# Altium PCB 电源小板.PcbDoc
Units mil, origin at the board's own origin, x right, y up, seen from the top; angles counter-clockwise.
Board outline 6000 x 4000 mil, 2 copper layers (Top Layer, Bottom Layer); 30 components, 11 nets, 136 pads, 0 vias.
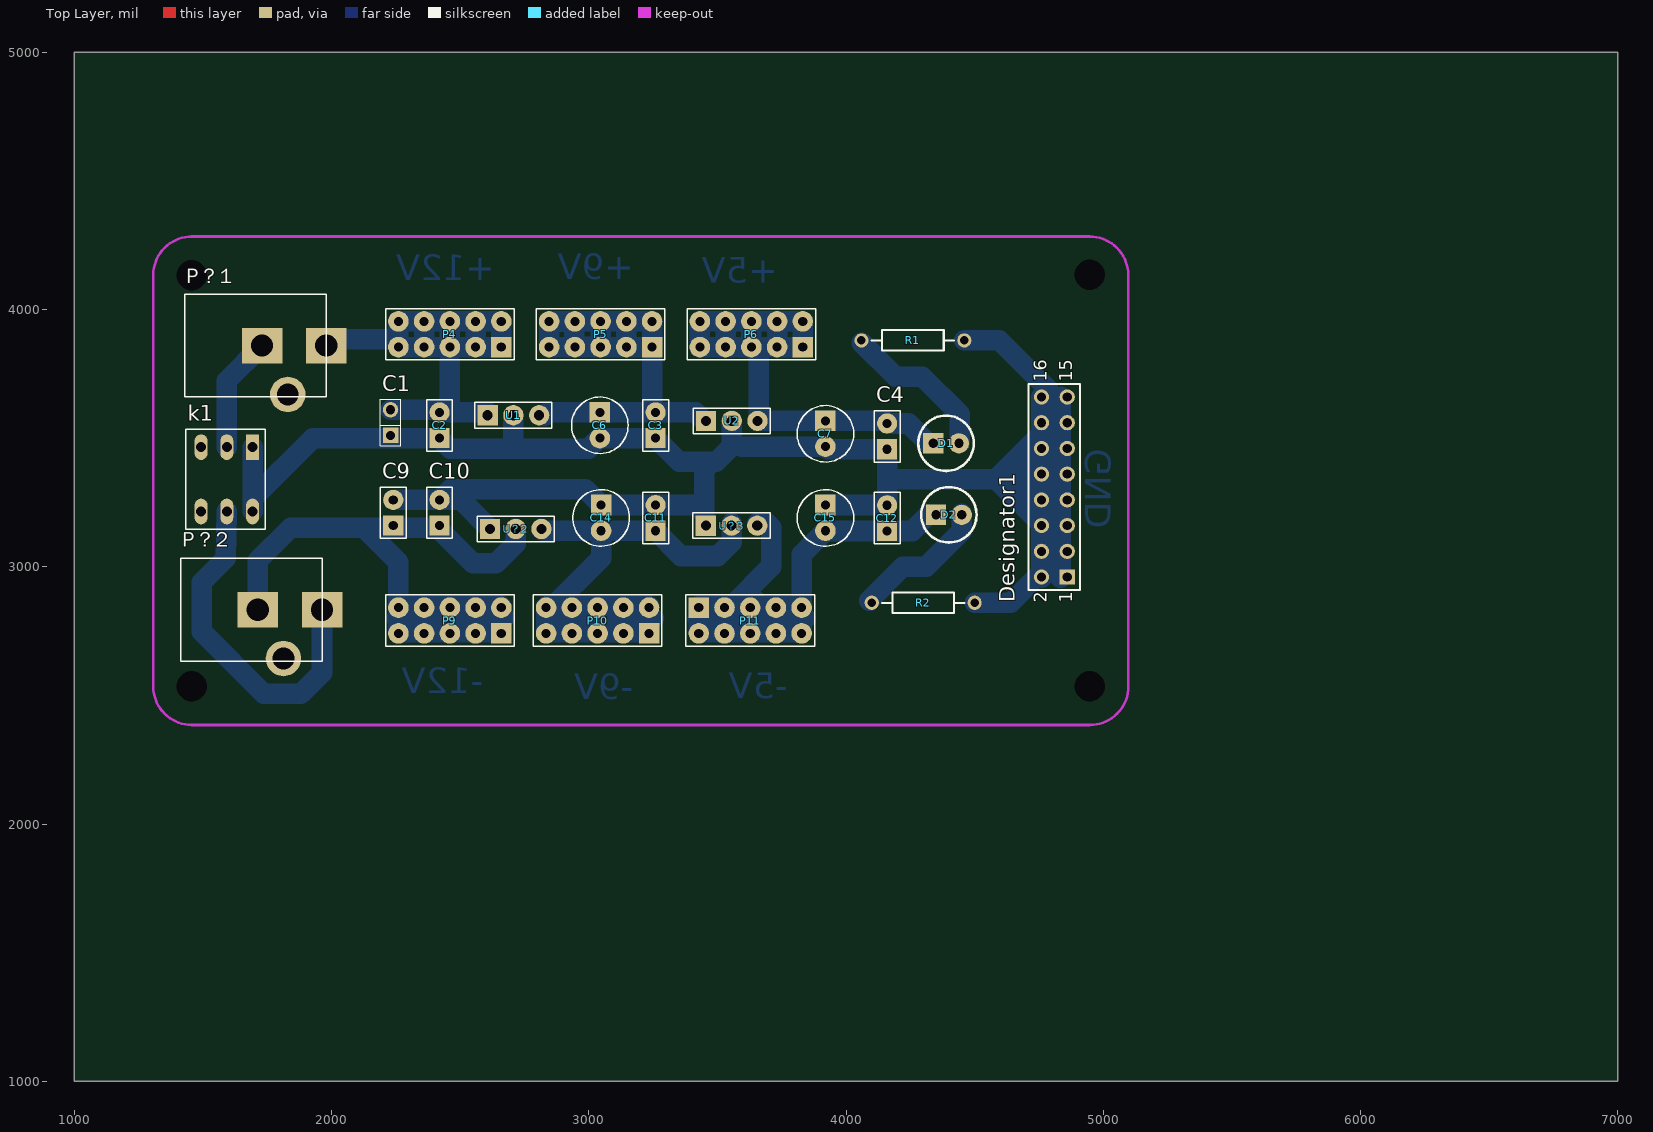
[diagram p0: Top Layer view]
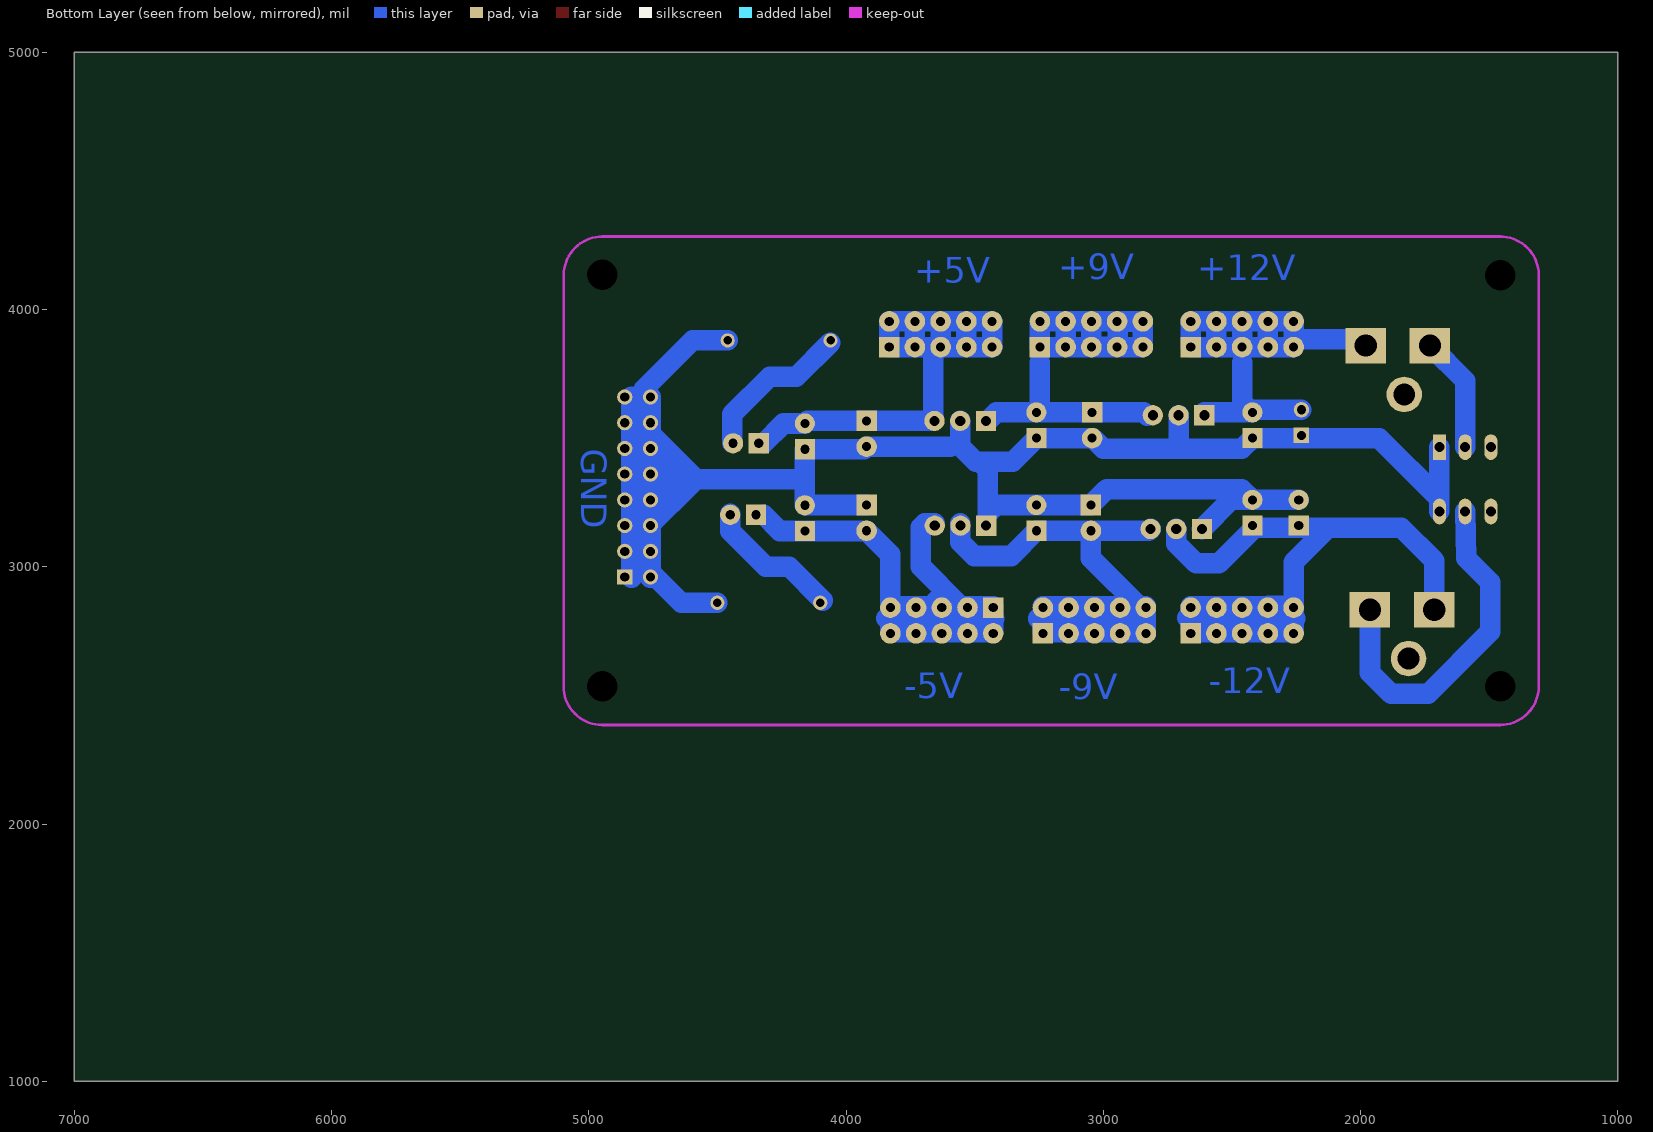
[diagram p1: Bottom Layer view, seen from below]

## Layer stack, top to bottom
Top Layer: signal copper 1.4
Dielectric: dielectric 12.6, FR-4, Dk 4.8
Bottom Layer: signal copper 1.4

## Board outline
1000,1000 7000,1000 7000,5000 1000,5000

## Design rules (kind name [scope] priority, off if disabled: settings)
Clearance [All] p1: gap=15
HoleToHoleClearance [All] p1: gap=0 allowstackedmicrovias=TRUE
MinimumSolderMaskSliver [All] p1: minsoldermaskwidth=0
PlaneClearance [All] p1: clearance=15
PolygonConnect [All] p1: connectstyle=Relief reliefconductorwidth=10 reliefentries=4 polygonreliefangle="90 Angle"
RoutingLayers [All] p1: top layer_v5=FALSE bottom layer_v5=TRUE
RoutingVias [All] p1: holewidth=28 width=50 viastyle="Through Hole" minholewidth=28 minwidth=50 maxholewidth=28 maxwidth=50
SilkToSilkClearance [All] p1: silktosilkclearance=0
SilkscreenOverComponentPads [All] p1: minsilkscreentomaskgap=0
SolderMaskExpansion [All] p1: expansion=4
TestPointUsage [All] p1: valid=0 allowmultiple=FALSE
Testpoint [All] p1: side=15 testpointundercomponent=TRUE minsize=40 maxsize=100 preferedsize=60 minholesize=0 maxholesize=40 preferedholesize=32 testpointgrid=1 style=1021 order=0-112345678
Width [All] p1: maxlimit=10000 minlimit=10 preferedwidth=20
18 further rules are at their usual default settings.

## Components (designator, comment, footprint, x,y, rotation, side; value= is the part's Value field where it differs from the comment)
C1 "瓷片电容" "PIN 2" 2229.5,3510.5 r90 top
C2 "100nf" C瓷片电容 2420,3500 r90 top
C3 "100nf" C瓷片电容 3260,3500 r90 top
C4 "100nf" C瓷片电容 4160,3457 r90 top
C6 "C电解电容" "C (10,100,330UF)" 3043,3600 r0 top
C7 "C电解电容" "C (10,100,330UF)" 3920,3567 r0 top
C9 "100nf" C瓷片电容 2240,3160 r90 top
C10 "100nf" C瓷片电容 2420,3160 r90 top
C11 "100nf" C瓷片电容 3260,3140 r90 top
C12 "100nf" C瓷片电容 4160,3139 r90 top
C14 "C电解电容" "C (10,100,330UF)" 3048,3240 r0 top
C15 "C电解电容" "C (10,100,330UF)" 3920,3240 r0 top
D1 "LED" LED 4339,3480 r0 top
D2 "LED" LED 4350,3202 r0 top
Designator1 "Comment" HDR2X8 4860,2960 r90 top
k1 "key6" key6 1693,3465 r270 top
P4 "PIN5*2" PIN5*2 2660,3854 r180 top
P5 "PIN5*2" PIN5*2 3246,3854 r180 top
P6 "PIN5*2" PIN5*2 3832,3854 r180 top
P9 "PIN5*2" PIN5*2 2660,2741 r180 top
P10 "PIN5*2" PIN5*2 3234.33,2741 r180 top
P11 "PIN5*2" PIN5*2 3427.67,2841 r0 top
P？1 "电源接口" 电源接口 1980,3860 r180 top
P？2 "电源接口" 电源接口 1963,2833 r180 top
R1 "Res2" AXIAL-0.4 4260,3880 r0 top
R2 "Res2" AXIAL-0.4 4300,2860 r180 top
U1 "7805" 7805 2778,3482 r0 top
U2 "7805" 7805 3627,3460 r0 top
U？2 "7905" 7805 2787,3040 r0 top
U？3 "7905" 7805 3626,3053 r0 top

## Footprints (in the part's own frame and the unit in brackets; to place one, negate y for a bottom-side part, rotate by r counter-clockwise, add the part's x,y. Pads: shape width x height; smd on the part's side, far side on the other; paste and mask are expansions set on the pad)
7805 [mm]
  rect 2x2 hole 1: 1(-4.342,2.716)
  round 2 hole 1: 2(-1.802,2.716) 3(0.738,2.716)
  silkscreen extent -5.61,1.45 2.01,3.99
AXIAL-0.4 [mm] "Resistor; 2 Leads"
  round 1.4 hole 0.85: 1(-5.08,0) 2(5.08,0)
  silkscreen extent -4.06,-1.02 4.06,1.02
"C (10,100,330UF)" [mil]
  rect 80x80 hole 35.43: 1(0,0)
  round 80 hole 35.43: 2(0,-100)
  silkscreen extent -110,-160 110,60
C瓷片电容 [mm]
  rect 1.991x1.991 hole 0.9: 1(0,0)
  round 1.991 hole 0.9: 2(2.54,0)
  silkscreen extent -1.27,-1.27 3.81,1.27
HDR2X8 [mm] "Connector; Header; 8x2 Position"
  rect 1.5x1.5 hole 0.9: 1(0,0)
  round 1.5 hole 0.9: 2(0,2.54) 3(2.54,0) 4(2.54,2.54) 5(5.08,0) 6(5.08,2.54) 7(7.62,0) 8(7.62,2.54) 9(10.16,0) 10(10.16,2.54) 11(12.7,0) 12(12.7,2.54) 13(15.24,0) 14(15.24,2.54) 15(17.78,0) 16(17.78,2.54)
  silkscreen extent -1.27,-1.27 19.05,3.81
key6 [mm]
  rect 2.54x1.27 hole 1: 1(0,0)
  oval 2.54x1.27 hole 1: 2(0,-2.54) 3(0,-5.08) 4(6.35,-5.08) 5(6.35,-2.54) 6(6.35,0)
  silkscreen extent -1.78,-6.6 8.13,1.27
LED [mm]
  rect 1.991x1.991 hole 0.9: 1(0,0)
  round 1.991 hole 0.9: 2(2.54,0)
  silkscreen extent -1.47,-2.74 4.01,2.74
PIN5*2 [mil]
  rect 80x80 hole 35.43: 1(0,0)
  round 80 hole 35.43: 2(100,0) 3(200,0) 4(300,0) 5(400,0) 6(0,-100) 7(100,-100) 8(200,-100) 9(300,-100) 10(400,-100)
  silkscreen extent -50,-150 450,50
"PIN 2" [mil]
  rect 60x60 hole 35.43: 1(0,0)
  round 60 hole 35.43: 2(100,0)
  silkscreen extent -40,-40 140,40
电源接口 [mm]
  rect 4x3.5 hole 2.2: 1(0,0) 2(6.35,0)
  round 3.5 hole 2.15: 3(3.81,4.826)
  silkscreen extent 0,-5.08 13.97,5.08

## Part data
C2 C3 C4 C9 C10 C11 C12: library part C电容
R1 R2: "Resistor"

## Free pads (board coordinates)
  round 60 hole 118.11: 0(1457,2535) 0(1457,4134) 0(4947,4135) 0(4948,2535)

## Nets (pads, with @x,y where several pads share a name; then routed paths per layer and width w, separated by ;. In a path a pad name is that pad's centre, name@x,y a point inside that pad or via, vN(x,y) a via of type N, cw(c..) or ccw(c..) an arc to the next point about the centre after c; other vN are vias at no path point)
GND: C1.1 C2.1 C3.1 C4.1 C6.2 C7.2 C9.2 C10.2 C11.2 C12.2 C14.1 C15.1 Designator1.1 Designator1.2 Designator1.3 Designator1.4 Designator1.5 Designator1.6 Designator1.7 Designator1.8 Designator1.9 Designator1.10 Designator1.11 Designator1.12 Designator1.13 Designator1.14 Designator1.15 Designator1.16 k1.1 k1.6 R1.2 R2.1 U1.2 U2.2 U？2.1 U？3.1 | length 9056.6
  Bottom Layer w80: k1.6 k1.1 ; 1693,3265 1928,3500 C2.1 2461,3459 2664.72,3459 2999,3459 3040,3500 C3.1 3352,3408 3480,3408 ; C9.2 C10.2 ; U？2.1 2502.99,3260 C10.2 ; 2707.05,3501.34 U1.2 ; U2.2 3556.06,3468.06 3496,3408 3480,3408 ; 3595.55,3466.93 3919.93,3466.93 C7.2 3930,3457 C4.1 4160,3341 ; C15.1 4159,3240 C12.2 4160,3341 ; R1.2 4596,3880 4786,3690 4786,3543 4583.5,3340.5 4780,3144 4780,3000 4640,2860 R2.1 ; 4601,3341 4465,3341 4160,3341 ; 4665,3259 4665,3396 ; 4707,3219 4707,3451 ; Designator1.2@4760,2957 Designator1.16 ; Designator1.1@4834,2957 Designator1.15@4834,3660 ; C10.2 2461,3301 2987,3301 C14.1 C11.2 3415.99,3240 3449.06,3206.93 3449.06,3377.06 3480,3408
NetC1_2: C1.2 C2.2 P4.1 P4.2 P4.3 P4.4 P4.5 P4.6 P4.7 P4.8 P4.9 P4.10 P？1.1 U1.1 | length 2170.4
  Bottom Layer w80: P？1.1 2004,3884 P4.5@2260,3884 ; C1.2 2409.5,3610.5 C2.2 ; P4.10@2260,3943 P4.5 P4.4 P4.3 ; P4.10 P4.9 ; P4.4@2360,3856 P4.9 ; 2460,3795 2460,3640 C2.2 ; U1.1@2607.05,3600 C2.2 ; P4.9 P4.8 ; P4.3 P4.2 ; P4.3 P4.8 ; P4.8 P4.7 ; P4.2 P4.1 P4.6 P4.7 ; P4.2 P4.7
NetC3_2: C3.2 C6.1 P5.1 P5.2 P5.3 P5.4 P5.5 P5.6 P5.7 P5.8 P5.9 P5.10 U1.3 U2.1 | length 2430.7
  Bottom Layer w80: U1.3@2829.05,3586.93 2842.12,3600 3040,3600 C3.2 ; P5.10 P5.9 P5.8 ; 3246,3795 3246,3614 C3.2 ; U2.1@3449.06,3566.93 3415.99,3600 C3.2 ; P5.8 3046,3858 3044,3856 2944,3856 2944,3952 2846,3952 P5.5 P5.4 P5.3 P5.2 ; P5.8 P5.7 ; P5.8 P5.7 ; P5.2 P5.1 P5.6 P5.7 ; P5.2 P5.7
NetC4_2: C4.2 C7.1 D1.1 P6.1 P6.2 P6.3 P6.4 P6.5 P6.6 P6.7 P6.8 P6.9 P6.10 U2.3 | length 2476.5
  Bottom Layer w80: 3660.94,3806 3660.94,3566.93 3661.01,3567 4150,3567 C4.2 4243,3557 D1.1@4320,3480 ; 3660.94,3825.06 P6.3 ; P6.5 3432,3853 3531,3853 P6.4 ; P6.5 P6.10 P6.9 ; P6.5 P6.4 ; P6.4 P6.9 ; P6.4 P6.3 ; P6.9 P6.8 ; P6.9 P6.8 ; P6.3 P6.8 ; P6.3 P6.2 ; P6.8 P6.7 ; P6.2 P6.1 P6.6 P6.7 ; P6.2 P6.7
NetC9_1: C9.1 C10.1 P9.1 P9.2 P9.3 P9.4 P9.5 P9.6 P9.7 P9.8 P9.9 P9.10 P？2.2 U？2.2 | length 3722.7
  Bottom Layer w80: P？2.2 1713,3024 1841,3152 2126,3152 ; 2254.33,2799 2259.75,2799.03 2260,2799.03 ; P9.10 2260,3018 2126,3152 ; 2673,2801 2660.22,2800.94 2660,2800.94 ; U？2.2 2716.06,3090.41 2638.65,3013 2551,3013 2412,3152 2126,3152 ; 2260,2799.03 2260,2746 P9.4@2360,2746 ; 2260,2799.03 P9.10@2260,2846 ; 2260,2799.03 2260.22,2799.03 2358,2799.5 ; P9.10@2260,2846 P9.9@2358,2846 ; P9.10@2260,2846 2260,2848 2358,2848 P9.9@2358,2846 ; 2358,2799.5 2359.74,2799.5 2360.22,2799.51 2413.76,2799.76 ; 2358,2799.5 2358,2748 P9.4@2360,2746 ; 2358,2799.5 P9.9@2358,2846 ; P9.9@2358,2846 2360,2846 P9.8@2460,2846 ; P9.4@2360,2746 P9.3@2460,2746 ; P9.4@2360,2746 2413.76,2799.76 ; 2413.76,2799.76 2459.74,2799.98 2460,2799.98 ; 2413.76,2799.76 P9.8@2460,2846 ; P9.3@2460,2746 P9.2@2560,2746 ; P9.3@2460,2746 2460,2799.98 ; 2460,2799.98 2460.22,2799.98 2559.74,2800.46 2560,2800.46 ; 2460,2799.98 P9.8@2460,2846 ; P9.8@2460,2846 P9.7@2560,2846 ; P9.2@2560,2746 2660,2746 2660,2800.94 ; P9.2@2560,2746 2560,2800.46 ; 2560,2800.46 2560.22,2800.46 2659.74,2800.94 2660,2800.94 ; 2560,2800.46 P9.7@2560,2846 ; P9.7@2560,2846 2660,2846 2660,2800.94
NetC11_1: C11.1 C14.2 P10.1 P10.2 P10.3 P10.4 P10.5 P10.6 P10.7 P10.8 P10.9 P10.10 U？2.3 U？3.2 | length 2895.1
  Bottom Layer w80: U？2.3 2822.99,3140 C14.2 ; 2834.33,2797 3253,2799 ; P10.10@2843,2829 3048,3034 C14.2 ; P10.7@3139.55,2846 3134.33,2840.78 P10.2@3134.33,2746 ; U？3.2@3555.06,3168.93 3555.06,3095.06 3502,3042 3358,3042 C11.1 C14.2 ; P10.4@2934.33,2746 P10.3@3034.33,2746 ; P10.4@2934.33,2746 P10.3@3034.33,2746 ; P10.4@2934.33,2746 2834.33,2746 2834.33,2846 2934,2846 2934.33,2846 3034.33,2846 3134.33,2846 3234.33,2846 3234.33,2746 P10.2@3134.33,2746 ; P10.3@3034.33,2746 P10.2@3134.33,2746
NetC12_1: C12.1 C15.2 D2.1 P11.1 P11.2 P11.3 P11.4 P11.5 P11.6 P11.7 P11.8 P11.9 P11.10 U？3.3 | length 3053.3
  Bottom Layer w80: 3424.33,2798 3843,2800 ; P11.2@3559.33,2851.67 3708.7,3001.03 3708.7,3153.29 3693.06,3168.93 U？3.3@3655.06,3168.93 ; P11.3@3649.06,2867.39 P11.3@3627.67,2846 ; P11.5@3827.67,2824 3827.67,3047.67 C15.2 3921,3139 C12.1 4257,3139 D2.1@4320,3202 ; P11.7@3527.67,2746 P11.2@3527.67,2846 ; P11.7@3527.67,2746 3427.67,2746 3427.67,2846 P11.2@3527.67,2846 ; P11.7@3527.67,2746 P11.8@3627.67,2746 ; P11.2@3527.67,2846 P11.3@3627.67,2846 ; P11.8@3627.67,2746 P11.3@3627.67,2846 ; P11.8@3627.67,2746 P11.9@3727.67,2746 ; P11.8@3627.67,2746 P11.9@3727.67,2746 ; P11.3@3627.67,2846 P11.4@3727.67,2846 ; P11.9@3727.67,2746 P11.4@3727.67,2846 ; P11.9@3727.67,2746 3827.67,2746 3827.67,2846 P11.4@3727.67,2846
NetD1_2: D1.2 R1.1 | length 607.9
  Bottom Layer w80: R1.1@4060.5,3871.5 4193,3739 4297,3739 4443,3593 D1.2@4443,3483
NetD2_2: D2.2 R2.2 | length 538
  Bottom Layer w80: R2.2@4090,2869 4221,3000 4311.28,3000 4450,3138.72 D2.2@4450,3205
Netk1_2: k1.2 P？1.2 | length 451.7
  Bottom Layer w80: k1.2 1593,3723 P？1.2
Netk1_5: k1.5 P？2.1 | length 1353
  Bottom Layer w80: k1.5 1588.43,3032.85 1494.91,2939.33 1494.91,2748.09 1737,2506 1881,2506 1963,2588 P？2.1
pads on no net: k1.3 k1.4 P？1.3 P？2.3

## Keep-outs
Keep-Out Layer:
  lines w10: 1307,4134 cw(c1457,4134) 1457,4284 ; 1307,4137 1307,2535 ccw(c1457,2535) 1457,2385 4948,2385 ccw(c4948,2535) 5098,2535 5098,4134 ; 1454,4284 4947,4284 cw(c4947,4134) 5097,4134

## Other copper
Bottom Layer:
  text "+9V" at 3175,4118 h100
  text "+12V" at 2635,4114 h100
  text "+5V" at 3735,4104 h100
  text "GND" at 5030,3459 h100 r90
  text "-12V" at 2589,2508 h100
  text "-5V" at 3774,2489 h100
  text "-9V" at 3172,2485 h100

## Text inside footprints (layer, text, board x,y; h text height)
Designator1: Top Overlay "2" at 4780,2860 h50 r90; Top Overlay "1" at 4880,2860 h50 r90; Top Overlay "15" at 4880,3720 h50 r90; Top Overlay "16" at 4780,3720 h50 r90